# Altium PCB H202.PcbDoc (part 2 of 4)
Units mm, origin at the board's own origin, x right, y up, seen from the top; angles counter-clockwise.
Board outline 35.5 x 51.5 mm, 2 copper layers (Top Layer, Bottom Layer); 187 components, 179 nets, 669 pads, 25 vias.
Unrouted connection lines stored in the file: 414.
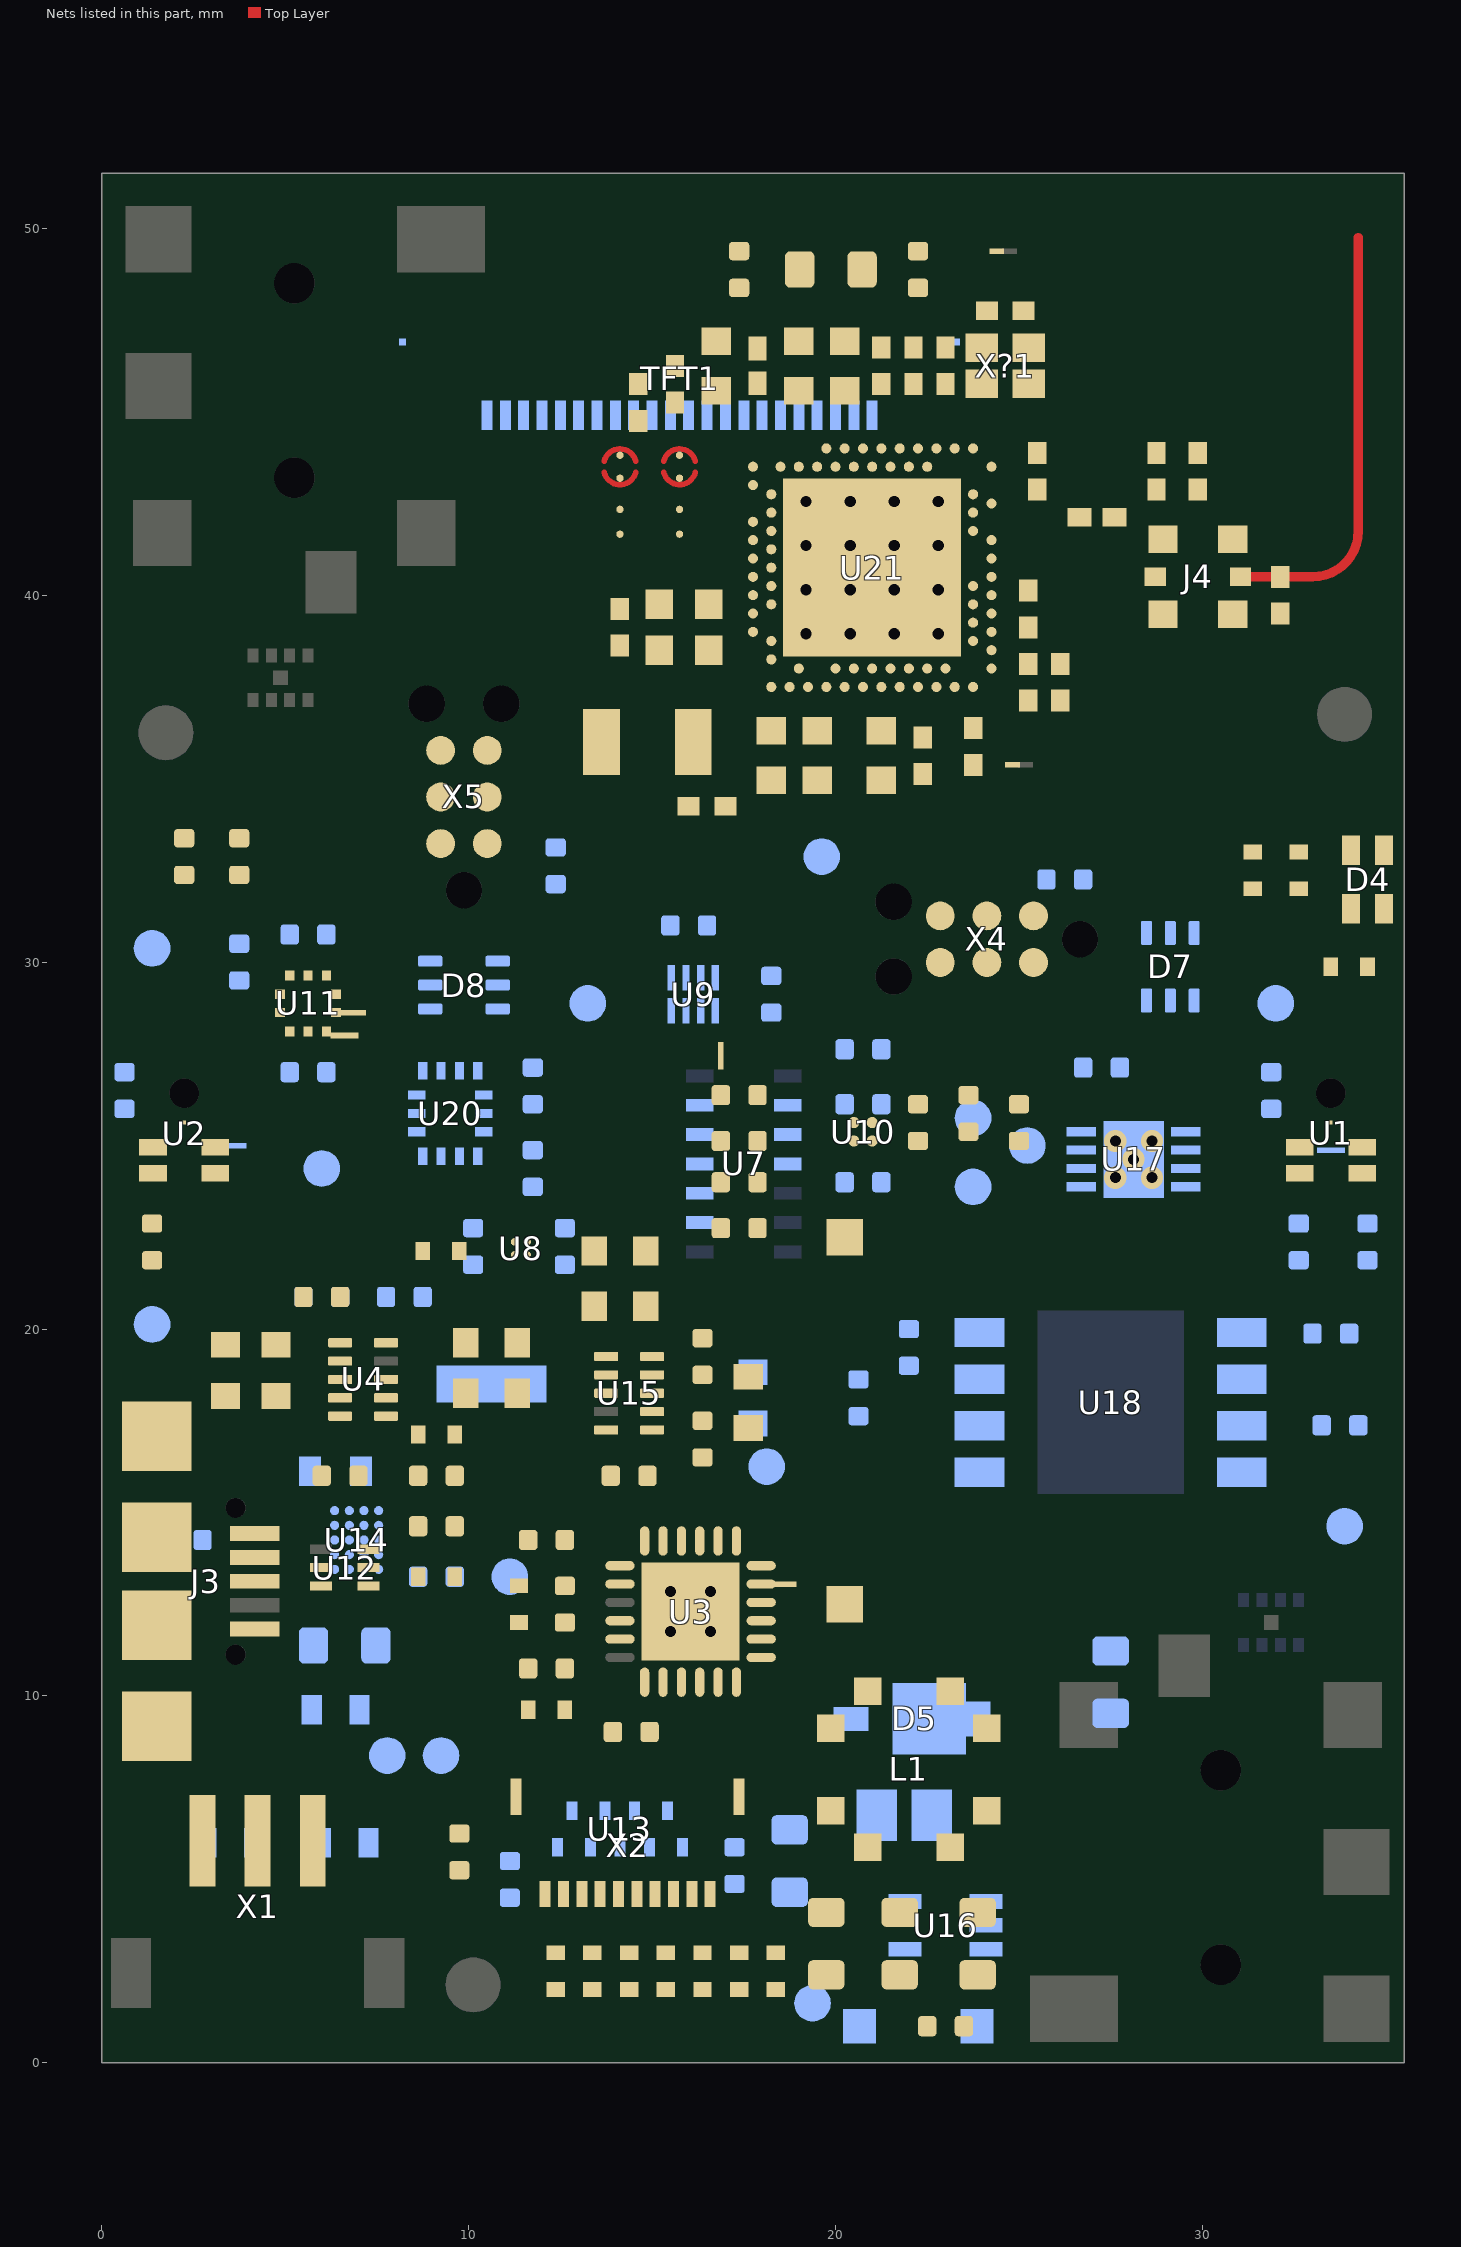
[diagram p2: the nets of this part, all layers, seen from the top]

## Part data (continued)
C8 C9 C11 C12 C33 C34 C36 C37 C38 C41 C42 C43: "10µF ±10% 16V Ceramic Capacitor X5R 0603 (1608 Metric)", Capacitance=10uF, Case Code (Imperial)=0603, Case Code (Metric)=1608, Dielectric=X5R, Manufacturer=Murata, Manufacturer Part Number=GRM188R61C106KAALJ, Max Operating Temperature=85°C, Min Operating Temperature=-55°C, Package Quantity=10000, Supplier Part Number 1=490-12736-1-ND, Tolerance=10%, Voltage Rating=16V, Case/Package=0603, Composition=Ceramic, Height=0.8mm, Length=0.063inch, Mount="Surface Mount", Packaging="Tape and Reel", Pricing 1="1=0.39, 10=0.271, 100=0.1628, 500=0.1221, 1000=0.1031, 2500=0.0977, 5000=0.0923 (USD)", Stock 1=5470, Supplier 1=Digi-Key, Termination=SMD/SMT, Thickness=0.037inch, Voltage Rating (DC)=16V, Weight=0.000222oz, Width=0.031inch
C10 C35: "100pF ±5% 50V Ceramic Capacitor C0G, NP0 0402 (1005 Metric)", Capacitance=100pF, Case Code (Imperial)=0402, Case Code (Metric)=1005, Dielectric=C0G, Dielectric Material=Ceramic, Insulation Resistance=100GR, Manufacturer=Yageo, Manufacturer Part Number=CC0402JRNPO9BN101, Max Operating Temperature=125°C, Min Operating Temperature=-55°C, Package Quantity=1, Supplier Part Number 1=311-1024-6-ND, Temperature Coefficient=30ppm/°C, Tolerance=5%, Voltage=50V, Case/Package=0402, ComponentLink1Description=http://www.farnell.com/datasheets/2213336.pdf?src-supplier=Newark, ComponentLink1URL=http://www.farnell.com/datasheets/2213336.pdf?src-supplier=Newark, ComponentLink2Description=http://www.yageo.com/documents/recent/UPY-GP_NP0_16V-to-50V_16.pdf?src-supplier=Digi-Key, ComponentLink2URL=http://www.yageo.com/documents/recent/UPY-GP_NP0_16V-to-50V_16.pdf?src-supplier=Digi-Key, ComponentLink3Description=http://documents.rs-components.com/techlib://itc_doclist_GB.htm?stockno=6698684&src-supplier=RSComponents, ComponentLink3URL=http://documents.rs-components.com/techlib://itc_doclist_GB.htm?stockno=6698684&src-supplier=RSComponents, ComponentLink4Description=http://www.yageo.com/documents/recent/UPY-GP_NP0_16V-to-50V_8.pdf?src-supplier=Avnet+Europe, ComponentLink4URL=http://www.yageo.com/documents/recent/UPY-GP_NP0_16V-to-50V_8.pdf?src-supplier=Avnet+Europe, ComponentLink5Description=http://www.farnell.com/datasheets/1443161.pdf?src-supplier=Element14, ComponentLink5URL=http://www.farnell.com/datasheets/1443161.pdf?src-supplier=Element14, ComponentLink6Description=http://www.farnell.com/datasheets/2213336.pdf?src-supplier=Element14, ComponentLink6URL=http://www.farnell.com/datasheets/2213336.pdf?src-supplier=Element14, Composition=Ceramic, Depth=0.5mm, Height=0.5mm, Lead Free="Lead Free", Length=1mm, Mount="Surface Mount", Number of Pins=2, Packaging="Tape and Reel", Pricing 1="1=0.1, 10=0.02, 100=0.0089, 500=0.0064, 1000=0.005, 2500=0.0046, 5000=0.0042 (USD)", Radiation Hardening=No, REACH SVHC="No SVHC", Stock 1=3017640, Supplier 1=Digi-Key, Termination=SMD/SMT, Thickness=0.022inch, Voltage Rating=50V, Voltage Rating (DC)=50V, Width=0.5mm
C14 C30: "4.7µF ±20% 6.3V Ceramic Capacitor X5R 0402 (1005 Metric)", Capacitance=4.7uF, Case Code (Imperial)=0402, Case Code (Metric)=1005, Manufacturer=Samsung, Manufacturer Part Number=CL05A475MQ5NRNC, Max Operating Temperature=85°C, Min Operating Temperature=-55°C, Supplier Part Number 1=1276-1056-1-ND, Tolerance=20%, Voltage Rating=6.3V, Case/Package=0402, ComponentLink1Description=https://www.verical.com/server-webapp/html/getDatasheet?partID=359681&src-supplier=Verical, ComponentLink1URL=https://www.verical.com/server-webapp/html/getDatasheet?partID=359681&src-supplier=Verical, ComponentLink2Description=http://www1.futureelectronics.com/doc/SAMSUNG/CL05A475MQ5NRNC.pdf?src-supplier=Future+Electronics, ComponentLink2URL=http://www1.futureelectronics.com/doc/SAMSUNG/CL05A475MQ5NRNC.pdf?src-supplier=Future+Electronics, Length=0.039inch, Mount="Surface Mount", Packaging="Tape and Reel", Pricing 1="1=0.14, 10=0.099, 50=0.0564, 100=0.0467, 500=0.0327, 1000=0.0271, 2500=0.0252, 5000=0.0231 (USD)", RoHS Compliant=Yes, Series=CL, Stock 1=746765, Supplier 1=Digi-Key, Thickness=0.022inch, Width=0.02inch
C16 C29 C31: "10µF ±20% 6.3V Ceramic Capacitor X5R 0402 (1005 Metric)", Capacitance=10uF, Case Code (Imperial)=0402, Case Code (Metric)=1005, Dielectric=X5R, Manufacturer=Samsung, Manufacturer Part Number=CL05A106MQ5NUNC, Max Operating Temperature=85°C, Min Operating Temperature=-55°C, Package Quantity=1, Supplier Part Number 1=1276-1451-1-ND, Tolerance=20%, Voltage Rating=6.3V, Case/Package=0402, ComponentLink1Description=https://www.verical.com/server-webapp/html/getDatasheet?partID=355289&src-supplier=Verical, ComponentLink1URL=https://www.verical.com/server-webapp/html/getDatasheet?partID=355289&src-supplier=Verical, ComponentLink2Description=http://www1.futureelectronics.com/doc/SAMSUNG/CL05A106MQ5NUNC.pdf?src-supplier=Future+Electronics, ComponentLink2URL=http://www1.futureelectronics.com/doc/SAMSUNG/CL05A106MQ5NUNC.pdf?src-supplier=Future+Electronics, Construction=Flat, Depth=0.5mm, Height=0.5mm, Length=1mm, Mount="Surface Mount", Packaging="Tape and Reel", Pricing 1="1=0.27, 10=0.187, 50=0.1248, 100=0.1061, 500=0.0749, 1000=0.0655, 2500=0.0624, 5000=0.0577 (USD)", Radiation Hardening=No, Series=CL, Stock 1=1544395, Supplier 1=Digi-Key, Thickness=0.028inch, Width=0.02inch
C17 C18 C32: "2.2µF ±20% 6.3V Ceramic Capacitor X5R 0402 (1005 Metric)", Capacitance=2.2uF, Case Code (Imperial)=0402, Case Code (Metric)=1005, Dielectric=X5R, Manufacturer=Murata, Manufacturer Part Number=GRM155R60J225ME15D, Max Operating Temperature=85°C, Min Operating Temperature=-55°C, Package Quantity=10000, Supplier Part Number 1=490-4519-1-ND, Tolerance=20%, Voltage=6.3V, Case/Package=0402, ComponentLink1Description=https://www.murata.com/~/media/webrenewal/support/library/catalog/products/capacitor/mlcc/c02e.ashx?la=en-us&src-supplier=Digi-Key, ComponentLink1URL=https://www.murata.com/~/media/webrenewal/support/library/catalog/products/capacitor/mlcc/c02e.ashx?la=en-us&src-supplier=Digi-Key, ComponentLink2Description=http://www.murata.com/~/media/webrenewal/support/library/catalog/products/capacitor/mlcc/c02e.ashx?src-supplier=Avnet, ComponentLink2URL=http://www.murata.com/~/media/webrenewal/support/library/catalog/products/capacitor/mlcc/c02e.ashx?src-supplier=Avnet, ComponentLink3Description=http://www.farnell.com/datasheets/2047859.pdf?src-supplier=Element14, ComponentLink3URL=http://www.farnell.com/datasheets/2047859.pdf?src-supplier=Element14, ComponentLink4Description=https://produktinfo.conrad.com/datenblaetter/450000-474999/450128-da-01-de-VS_KONDENS_GRM155_R60J_225ME15D.pdf?src-supplier=Conrad, ComponentLink4URL=https://produktinfo.conrad.com/datenblaetter/450000-474999/450128-da-01-de-VS_KONDENS_GRM155_R60J_225ME15D.pdf?src-supplier=Conrad, Depth=0.5mm, Height=0.5mm, Lead Free="Lead Free", Length=1mm, Material=Ceramic, Mount="Surface Mount", Packaging="Tape and Reel", Pricing 1="1=0.29, 10=0.199, 100=0.1009, 500=0.0691, 1000=0.0611, 2500=0.0584, 5000=0.0531 (USD)", Radiation Hardening=No, REACH SVHC="No SVHC", Stock 1=4444410, Supplier 1=Digi-Key, Termination=SMD/SMT, Thickness=0.022inch, Voltage Rating=6.3V, Voltage Rating (DC)=6.3V, Width=0.02inch
C19 C20: library part "CAP CER 0.1UF 50V X7R 0402", "0.1µF ±10% 50V Ceramic Capacitor X7R 0402 (1005 Metric)", Capacitance=100nF, Case Code (Imperial)=0402, Case Code (Metric)=1005, Dielectric=X7R, Manufacturer=TDK, Max Operating Temperature=125°C, Min Operating Temperature=-55°C, Package Quantity=1, Ratings=AEC-Q200, Supplier Part Number 1=445-6899-1-ND, Tolerance=10%, Voltage=50V, Case/Package=0402, ComponentLink1Description=http://product.tdk.com/capacitor/mlcc/en/documents/mlccspec_automotive_general_midvoltage_en.pdf?src-supplier=Future+Electronics, ComponentLink1URL=http://product.tdk.com/capacitor/mlcc/en/documents/mlccspec_automotive_general_midvoltage_en.pdf?src-supplier=Future+Electronics, ComponentLink2Description=http://www.farnell.com/datasheets/1807242.pdf?src-supplier=Element14, ComponentLink2URL=http://www.farnell.com/datasheets/1807242.pdf?src-supplier=Element14, ComponentLink3Description=http://www.mouser.com/ds/2/400/lcc_automotive_general_en-843974.pdf?src-supplier=Mouser, ComponentLink3URL=http://www.mouser.com/ds/2/400/lcc_automotive_general_en-843974.pdf?src-supplier=Mouser, ComponentLink4Description=http://www.farnell.com/datasheets/1936565.pdf?src-supplier=Element14, ComponentLink4URL=http://www.farnell.com/datasheets/1936565.pdf?src-supplier=Element14, ComponentLink5Description=http://www.farnell.com/datasheets/1735392.pdf?src-supplier=Element14, ComponentLink5URL=http://www.farnell.com/datasheets/1735392.pdf?src-supplier=Element14, Composition=Ceramic, Depth=0.5mm, Height=0.5mm, Lead Free="Lead Free", Length=1mm, Manufacturer Part Number=CGA2B3X7R1H104K050BB, Mount="Surface Mount", Packaging="Tape and Reel", Pricing 1="1=0.17, 10=0.118, 50=0.0668, 100=0.0553, 500=0.0388, 1000=0.0321, 2500=0.0299, 5000=0.0273 (USD)", REACH SVHC="No SVHC", Stock 1=2925303, Supplier 1=Digi-Key, Termination=SMD/SMT, Thickness=0.022inch, Voltage Rating=50V, Voltage Rating (DC)=50V, Weight=2.3E-05oz, Width=0.02inch
C21 C45: "1µF ±10% 16V Ceramic Capacitor X5R 0402 (1005 Metric)", Capacitance=1uF, Case Code (Imperial)=0402, Case Code (Metric)=1005, Dielectric=X5R, Manufacturer=Yageo, Manufacturer Part Number=CC0402KRX5R7BB105, Max Operating Temperature=85°C, Min Operating Temperature=-55°C, Supplier Part Number 1=311-1691-1-ND, Tolerance=10%, Voltage Rating=16V, Case/Package=0402, ComponentLink1Description=http://www.yageo.com/documents/recent/UPY-GPHC_X5R_4V-to-50V_12.pdf?src-supplier=Avnet+Europe, ComponentLink1URL=http://www.yageo.com/documents/recent/UPY-GPHC_X5R_4V-to-50V_12.pdf?src-supplier=Avnet+Europe, Composition=Ceramic, Depth=0.5mm, Halogen Free="Halogen Free", Height=0.5mm, Lead Free="Lead Free", Length=1mm, Mount="Surface Mount", Packaging="Tape and Reel", Pricing 1="1=0.4, 10=0.278, 100=0.167, 500=0.1253, 1000=0.1058, 2500=0.1002, 5000=0.0947 (USD)", Radiation Hardening=No, Stock 1=1114963, Supplier 1=Digi-Key, Termination=SMD/SMT, Thickness=0.022inch, Voltage Rating (DC)=16V, Weight=2.3E-05oz, Width=0.02inch
C23 C24: "0.1µF ±10% 16V Ceramic Capacitor X7R 0402 (1005 Metric)", Capacitance=100nF, Case Code (Imperial)=0402, Case Code (Metric)=1005, Dielectric=X7R, Manufacturer=YAGEO, Manufacturer Part Number=CC0402KRX7R7BB104, Max Operating Temperature=125°C, Min Operating Temperature=-55°C, Package Quantity=1, Supplier Part Number 1=311-1338-1-ND, Tolerance=10%, Voltage=16V, ComponentLink1Description=http://www.yageo.com/documents/recent/UPY-GPHC_X7R_6.3V-to-50V_8.pdf?src-supplier=Avnet+Europe, ComponentLink1URL=http://www.yageo.com/documents/recent/UPY-GPHC_X7R_6.3V-to-50V_8.pdf?src-supplier=Avnet+Europe, ComponentLink2Description=http://www.yageo.com/documents/recent/UPY-GPHC_X7R_6.3V-to-50V_18.pdf?src-supplier=Digi-Key, ComponentLink2URL=http://www.yageo.com/documents/recent/UPY-GPHC_X7R_6.3V-to-50V_18.pdf?src-supplier=Digi-Key, ComponentLink3Description=http://www.yageo.com/documents/recent/UPY-GPHC_X7R_6.3V-to-50V_8.pdf?src-supplier=Avnet, ComponentLink3URL=http://www.yageo.com/documents/recent/UPY-GPHC_X7R_6.3V-to-50V_8.pdf?src-supplier=Avnet, ComponentLink4Description=http://www.yageo.com/documents/recent/UPY-GPHC_X7R_6.3V-to-50V_18.pdf?src-supplier=Mouser, ComponentLink4URL=http://www.yageo.com/documents/recent/UPY-GPHC_X7R_6.3V-to-50V_18.pdf?src-supplier=Mouser, ComponentLink5Description=http://www.farnell.com/datasheets/2167236.pdf?src-supplier=Element14, ComponentLink5URL=http://www.farnell.com/datasheets/2167236.pdf?src-supplier=Element14, ComponentLink6Description=http://www.farnell.com/datasheets/1489800.pdf?src-supplier=Element14, ComponentLink6URL=http://www.farnell.com/datasheets/1489800.pdf?src-supplier=Element14, Composition=Ceramic, Depth=0.5mm, Halogen Free="Halogen Free", Height=0.5mm, Lead Free="Lead Free", Length=1mm, Mount="Surface Mount", Number of Pins=2, Order=CC0402KRX7R7BB104, Packaging="Tape and Reel", Pricing 1="1=0.1, 10=0.031, 100=0.0136, 500=0.0097, 1000=0.0077, 2500=0.007, 5000=0.0064 (USD)", Radiation Hardening=No, REACH SVHC="No SVHC", Revision="July-2002: Re-released for DXP Platform.", Stock 1=25916830, Supplier 1=Digi-Key, Termination=SMD/SMT, Thickness=0.022inch, Voltage Rating=16V, Voltage Rating (DC)=16V, Width=0.02inch
C25: library part "CAP CER 0.1UF 50V X7R 0402", "0.1µF ±10% 50V Ceramic Capacitor X7R 0402 (1005 Metric)", Capacitance=100nF, Case Code (Imperial)=0402, Case Code (Metric)=1005, Dielectric=X7R, Manufacturer=TDK, Manufacturer Part Number=CGA2B3X7R1H104K050BB, Max Operating Temperature=125°C, Min Operating Temperature=-55°C, Package Quantity=1, Ratings=AEC-Q200, Supplier Part Number 1=445-6899-1-ND, Tolerance=10%, Voltage=50V, Case/Package=0402, ComponentLink1Description=http://product.tdk.com/capacitor/mlcc/en/documents/mlccspec_automotive_general_midvoltage_en.pdf?src-supplier=Future+Electronics, ComponentLink1URL=http://product.tdk.com/capacitor/mlcc/en/documents/mlccspec_automotive_general_midvoltage_en.pdf?src-supplier=Future+Electronics, ComponentLink2Description=http://www.farnell.com/datasheets/1807242.pdf?src-supplier=Element14, ComponentLink2URL=http://www.farnell.com/datasheets/1807242.pdf?src-supplier=Element14, ComponentLink3Description=http://www.mouser.com/ds/2/400/lcc_automotive_general_en-843974.pdf?src-supplier=Mouser, ComponentLink3URL=http://www.mouser.com/ds/2/400/lcc_automotive_general_en-843974.pdf?src-supplier=Mouser, ComponentLink4Description=http://www.farnell.com/datasheets/1936565.pdf?src-supplier=Element14, ComponentLink4URL=http://www.farnell.com/datasheets/1936565.pdf?src-supplier=Element14, ComponentLink5Description=http://www.farnell.com/datasheets/1735392.pdf?src-supplier=Element14, ComponentLink5URL=http://www.farnell.com/datasheets/1735392.pdf?src-supplier=Element14, Composition=Ceramic, Depth=0.5mm, Height=0.5mm, Lead Free="Lead Free", Length=1mm, Mount="Surface Mount", Packaging="Tape and Reel", Pricing 1="1=0.17, 10=0.118, 50=0.0668, 100=0.0553, 500=0.0388, 1000=0.0321, 2500=0.0299, 5000=0.0273 (USD)", REACH SVHC="No SVHC", Stock 1=2925303, Supplier 1=Digi-Key, Termination=SMD/SMT, Thickness=0.022inch, Voltage Rating=50V, Voltage Rating (DC)=50V, Weight=2.3E-05oz, Width=0.02inch
C26: library part "CAP CER 4.7UF 10V X5R 0603", "4.7µF ±10% 10V Ceramic Capacitor X5R 0603 (1608 Metric)", Capacitance=4.7uF, Case Code (Imperial)=0603, Case Code (Metric)=1608, Dielectric=X5R, Manufacturer=Yageo, Manufacturer Part Number=CC0603KRX5R6BB475, Max Operating Temperature=85°C, Min Operating Temperature=-55°C, Package Quantity=1, Supplier Part Number 1=311-1455-1-ND, Tolerance=10%, Voltage Rating=10V, Case/Package=0603, ComponentLink1Description=http://www.farnell.com/datasheets/2167237.pdf?src-supplier=Element14, ComponentLink1URL=http://www.farnell.com/datasheets/2167237.pdf?src-supplier=Element14, ComponentLink2Description=http://www.yageo.com/documents/recent/UPY-GPHC_X5R_4V-to-50V_25.pdf?src-supplier=Digi-Key, ComponentLink2URL=http://www.yageo.com/documents/recent/UPY-GPHC_X5R_4V-to-50V_25.pdf?src-supplier=Digi-Key, ComponentLink3Description=http://www.yageo.com/documents/recent/UPY-GPHC_X5R_4V-to-50V_12.pdf?src-supplier=Avnet, ComponentLink3URL=http://www.yageo.com/documents/recent/UPY-GPHC_X5R_4V-to-50V_12.pdf?src-supplier=Avnet, ComponentLink4Description=http://www.yageo.com/documents/recent/UPY-GPHC_X5R_4V-to-50V_12.pdf?src-supplier=Avnet+Europe, ComponentLink4URL=http://www.yageo.com/documents/recent/UPY-GPHC_X5R_4V-to-50V_12.pdf?src-supplier=Avnet+Europe, Composition=Ceramic, Depth=0.8mm, Halogen Free="Halogen Free", Height=0.8mm, Lead Free="Lead Free", Length=1.6mm, Mount="Surface Mount", Packaging="Tape and Reel", Pricing 1="1=0.26, 10=0.18, 100=0.102, 500=0.072, 1000=0.063 (USD)", Radiation Hardening=No, REACH SVHC=Unknown, Stock 1=325858, Supplier 1=Digi-Key, Termination=SMD/SMT, Thickness=0.035inch, Voltage Rating (DC)=10V, Width=0.8mm
C28: "1µF ±20% 25V Ceramic Capacitor X5R 0603 (1608 Metric)", Capacitance=1uF, Case Code (Imperial)=0603, Case Code (Metric)=1608, Dielectric=X5R, Manufacturer=Yageo, Manufacturer Part Number=CC0603MRX5R8BB105, Max Operating Temperature=85°C, Min Operating Temperature=-55°C, Supplier Part Number 1=311-1823-1-ND, Tolerance=20%, Voltage Rating=25V, Case/Package=0603, ComponentLink1Description=http://www.yageo.com/exep/pages/download/literatures/ProductSelectionGuide%202014_Final_2.pdf?src-supplier=Digi-Key, ComponentLink1URL=http://www.yageo.com/exep/pages/download/literatures/ProductSelectionGuide%202014_Final_2.pdf?src-supplier=Digi-Key, ComponentLink2Description=http://www.yageo.com/documents/recent/UPY-GPHC_X5R_4V-to-50V_25.pdf?src-supplier=Digi-Key, ComponentLink2URL=http://www.yageo.com/documents/recent/UPY-GPHC_X5R_4V-to-50V_25.pdf?src-supplier=Digi-Key, Halogen Free="Halogen Free", Lead Free="Lead Free", Length=0.063inch, Mount="Surface Mount", Packaging="Tape and Reel", Pricing 1="1=0.13, 10=0.093, 50=0.0528, 100=0.0438, 500=0.0307, 1000=0.0254 (USD)", Stock 1=31570, Supplier 1=Digi-Key, Thickness=0.035inch, Voltage Rating (DC)=25V, Width=0.031inch
C40: "10µF ±10% 16V Ceramic Capacitor X7R 0805 (2012 Metric)", Capacitance=10uF, Case Code (Imperial)=0805, Case Code (Metric)=2012, Dielectric=X7R, Manufacturer=Samsung, Manufacturer Part Number=CL21B106KOQNNNG, Max Operating Temperature=125°C, Min Operating Temperature=-55°C, Package Quantity=3000, Supplier Part Number 1=1276-6472-1-ND, Tolerance=10%, Voltage Rating=16V, Case/Package=0805, ComponentLink1Description=http://www.samsungsem.com/kr/support/product-search/mlcc/CL21B106KOQNNNG.jsp?src-supplier=Digi-Key, ComponentLink1URL=http://www.samsungsem.com/kr/support/product-search/mlcc/CL21B106KOQNNNG.jsp?src-supplier=Digi-Key, ComponentLink2Description=https://produktinfo.conrad.com/datenblaetter/450000-474999/454918-da-01-en-VS_KONDENSATOR_0805.pdf?src-supplier=Conrad, ComponentLink2URL=https://produktinfo.conrad.com/datenblaetter/450000-474999/454918-da-01-en-VS_KONDENSATOR_0805.pdf?src-supplier=Conrad, Depth=1.25mm, Lead Free="Lead Free", Length=0.079inch, Material=Ceramic, Mount="Surface Mount", Packaging="Tape and Reel", Pricing 1="1=0.3, 10=0.207, 100=0.1173, 500=0.0828, 1000=0.0725 (USD)", Stock 1=251380, Supplier 1=Digi-Key, Thickness=0.055inch, Width=0.049inch
C44 C48 C49: "0.1µF ±10% 16V Ceramic Capacitor X7R 0402 (1005 Metric)", Capacitance=100nF, Case Code (Imperial)=0402, Case Code (Metric)=1005, Dielectric=X7R, Manufacturer=Yageo, Manufacturer Part Number=CC0402KRX7R7BB104, Max Operating Temperature=125°C, Min Operating Temperature=-55°C, Package Quantity=1, Supplier Part Number 1=311-1338-1-ND, Tolerance=10%, Voltage=16V, ComponentLink1Description=http://www.yageo.com/documents/recent/UPY-GPHC_X7R_6.3V-to-50V_8.pdf?src-supplier=Avnet+Europe, ComponentLink1URL=http://www.yageo.com/documents/recent/UPY-GPHC_X7R_6.3V-to-50V_8.pdf?src-supplier=Avnet+Europe, ComponentLink2Description=http://www.yageo.com/documents/recent/UPY-GPHC_X7R_6.3V-to-50V_18.pdf?src-supplier=Digi-Key, ComponentLink2URL=http://www.yageo.com/documents/recent/UPY-GPHC_X7R_6.3V-to-50V_18.pdf?src-supplier=Digi-Key, ComponentLink3Description=http://www.yageo.com/documents/recent/UPY-GPHC_X7R_6.3V-to-50V_8.pdf?src-supplier=Avnet, ComponentLink3URL=http://www.yageo.com/documents/recent/UPY-GPHC_X7R_6.3V-to-50V_8.pdf?src-supplier=Avnet, ComponentLink4Description=http://www.yageo.com/documents/recent/UPY-GPHC_X7R_6.3V-to-50V_18.pdf?src-supplier=Mouser, ComponentLink4URL=http://www.yageo.com/documents/recent/UPY-GPHC_X7R_6.3V-to-50V_18.pdf?src-supplier=Mouser, ComponentLink5Description=http://www.farnell.com/datasheets/2167236.pdf?src-supplier=Element14, ComponentLink5URL=http://www.farnell.com/datasheets/2167236.pdf?src-supplier=Element14, ComponentLink6Description=http://www.farnell.com/datasheets/1489800.pdf?src-supplier=Element14, ComponentLink6URL=http://www.farnell.com/datasheets/1489800.pdf?src-supplier=Element14, Composition=Ceramic, Depth=0.5mm, Halogen Free="Halogen Free", Height=0.5mm, Lead Free="Lead Free", Length=1mm, Mount="Surface Mount", Number of Pins=2, Order=CC0402KRX7R7BB104, Packaging="Tape and Reel", Pricing 1="1=0.1, 10=0.031, 100=0.0136, 500=0.0097, 1000=0.0077, 2500=0.007, 5000=0.0064 (USD)", Radiation Hardening=No, REACH SVHC="No SVHC", Revision="July-2002: Re-released for DXP Platform.", Stock 1=25916830, Supplier 1=Digi-Key, Termination=SMD/SMT, Thickness=0.022inch, Voltage Rating=16V, Voltage Rating (DC)=16V, Width=0.02inch
C50 C55: library part C0603-4µ7-6.3V-X7R, "Capacitor, X7R, ±10%, 6.3V", Manufacturer=Samsung, Manufacturer Part Number=CL10B475KQ8NQNC, Part number IPS=00000002541, Supplier Part Number 1=1276-2087-1-ND, Artikkelnr Noca=20039473, ComponentLink1Description=Datasheet, ComponentLink2Description="Supplier link", Footprint Doc=0603, HelpURL=http://media.digikey.com/pdf/Data%20Sheets/Samsung%20PDFs/CL10B475KQ8NQNC_Spec.pdf, LatestRevisionDate=2015-06-10, Note=6.3V, Part Number=C0603-4µ7-6.3V-X7R, Pin Count=2, Published=2015-06-10, Publisher="Nordic Semiconductor", Supplier 1=Digi-Key
C51 C52 C66 C67: library part C0402-12p, "Capacitor, NP0, ±2%", Part number IPS=00000002398, Artikkelnr Noca=20029159, ComponentLink1Description=Datasheet, ComponentLink2Description="Supplier link", Footprint Doc=0402, LatestRevisionDate=2011-05-11, Note=50V, Part Number=C0402-12p, Pin Count=2, Published=2009-05-08, Publisher="Nordic Semiconductor"
C53 C57: library part C0603-4µ7-10V-X7S, "Capacitor, X7S, ±10%, 10V", Part number IPS=00000001779, Supplier Part Number 1=445-14258-1-ND, Artikkelnr Noca=20030013, ComponentLink1Description=Datasheet, ComponentLink2Description="Supplier link", Footprint Doc=0603, LatestRevisionDate=2016-08-15, Note=10V, Part Number=C0603-4µ7-10V-X7S, Pin Count=2, Published=2016-08-15, Publisher="Nordic Semiconductor", Supplier 1=Digi-Key
C54 C60 C62 C65: library part C0402-100n, "Capacitor, X7R, ±10%", Part number IPS=00000005296, Artikkelnr Noca=20039200, ComponentLink1Description=Datasheet, ComponentLink2Description="Supplier link", Footprint Doc=0402, LatestRevisionDate=2009-11-23, Note=16V, Part Number=C0402-100n, Pin Count=2, Published=2009-05-08, Publisher="Nordic Semiconductor"
C56 C58: library part C0603-1µ0, "Capacitor, X7R, ±10%", Part number IPS=00000000616, Artikkelnr Noca=20039282, ComponentLink1Description=Datasheet, ComponentLink2Description="Supplier link", Footprint Doc=0603, LatestRevisionDate=2013-06-05, Note=16V, Part Number=C0603-1µ0, Pin Count=2, Published=2009-05-08, Publisher="Nordic Semiconductor"
C59: library part C0402-47n, "Capacitor, X7R, ±10%", Part number IPS=N.A., Artikkelnr Noca=20039389, ComponentLink1Description=Datasheet, ComponentLink2Description="Supplier link", Footprint Doc=0402, LatestRevisionDate=2009-05-08, Note="Chip Cap 10%", Part Number=C0402-47n, Pin Count=2, Published=2009-05-08, Publisher="Nordic Semiconductor"
C61 C69 C71: library part C0402-N.C., "Not mounted", Part number IPS=N.A., Artikkelnr Noca=N.A., Assembly="Not mounted", ComponentLink1Description=Datasheet, ComponentLink2Description="Supplier link", Footprint Doc=0402, LatestRevisionDate=2009-05-08, Note="Chip Cap", Part Number=C0402-N.C., Pin Count=2, Published=2009-05-08, Publisher="Nordic Semiconductor"
C63: library part C0402-0.8p, "Capacitor, NP0, ±5%", Part number IPS=00000007782, Artikkelnr Noca=20029147, ComponentLink1Description=Datasheet, ComponentLink2Description="Supplier link", Footprint Doc=0402, LatestRevisionDate=2012-11-21, Note=50V, Part Number=C0402-0.8p, Pin Count=2, Published=2009-05-08, Publisher="Nordic Semiconductor"
C64: library part C0402-820p, "Capacitor, NP0, ±5%", Part number IPS=N.A., Artikkelnr Noca=20029219, ComponentLink1Description=Datasheet, ComponentLink2Description="Supplier link", Footprint Doc=0402, LatestRevisionDate=2009-05-08, Note=50V, Part Number=C0402-820p, Pin Count=2, Published=2009-05-08, Publisher="Nordic Semiconductor"
C68: library part C0402-100p, "Capacitor, NP0, ±5%", Part number IPS=00000002361, Artikkelnr Noca=20029135, ComponentLink1Description=Datasheet, ComponentLink2Description="Supplier link", Footprint Doc=0402, LatestRevisionDate=2009-05-08, Note=50V, Part Number=C0402-100p, Pin Count=2, Published=2009-05-08, Publisher="Nordic Semiconductor"
C70: library part C0402-0.5p, "Capacitor, NP0, ±0.05pF", Part number IPS=N.A., Supplier Part Number 1=490-11250-1-ND, Artikkelnr Noca=20020007, ComponentLink1Description=Datasheet, ComponentLink2Description="Supplier link", Footprint Doc=0402, LatestRevisionDate=2017-02-23, Note=50V, Part Number=C0402-0.5p, Pin Count=2, Published=2009-05-08, Publisher="Nordic Semiconductor", Supplier 1=Digi-Key
C72: library part C0402-1.2p, "Capacitor, NP0, ±0.1pF", Part number IPS=00000005410, Artikkelnr Noca=20029157, ComponentLink1Description=Datasheet, ComponentLink2Description="Supplier link", Footprint Doc=0402, LatestRevisionDate=2011-05-11, Note=50V, Part Number=C0402-1.2p, Pin Count=2, Published=2009-05-08, Publisher="Nordic Semiconductor"
D1 D2 D3: library part "TVS DIODE ESDA7P120-1U1M 5.5V 11.5V 1610", "11.5V Clamp 120A (8/20µs) Ipp Tvs Diode Surface Mount 1610", Case Code (Imperial)=0603, Case Code (Metric)=1610, Clamping Voltage=11.5V, Manufacturer=STMicroelectronics, Max Operating Temperature=150°C, Min Breakdown Voltage=6.4V, Min Operating Temperature=-55°C, Peak Pulse Current=120A, Peak Pulse Power=1.4kW, Power Line Protection=No, Reverse Standoff Voltage=5.5V, Supplier Part Number 1=497-17159-1-ND, Case/Package=0603, ComponentLink1Description=http://www.st.com/content/ccc/resource/technical/document/datasheet/group3/5e/7c/5d/76/3f/de/45/35/DM00359316/files/DM00359316.pdf/jcr:content/translations/en.DM00359316.pdf?src-supplier=Digi-Key, ComponentLink1URL=http://www.st.com/content/ccc/resource/technical/document/datasheet/group3/5e/7c/5d/76/3f/de/45/35/DM00359316/files/DM00359316.pdf/jcr:content/translations/en.DM00359316.pdf?src-supplier=Digi-Key, ComponentLink2Description=http://www.farnell.com/datasheets/2815837.pdf?src-supplier=Newark, ComponentLink2URL=http://www.farnell.com/datasheets/2815837.pdf?src-supplier=Newark, ComponentLink3Description=http://www.farnell.com/datasheets/2815837.pdf?src-supplier=Farnell, ComponentLink3URL=http://www.farnell.com/datasheets/2815837.pdf?src-supplier=Farnell, ComponentLink4Description=http://www.farnell.com/datasheets/2815837.pdf?src-supplier=Element14, ComponentLink4URL=http://www.farnell.com/datasheets/2815837.pdf?src-supplier=Element14, Composition=Zener, Manufacturer Part Number=ESDA7P120-1U1M, Mount="Surface Mount", Number of Unidirectional Channels=1, Packaging="Cut Tape", Pricing 1="1=0.35, 10=0.287, 25=0.2624, 100=0.1647, 250=0.1629, 500=0.1525, 1000=0.1037, 2500=0.0994 (USD)", Stock 1=15775, Supplier 1=Digi-Key
D4: library part "LED RGB DIFFUSED SMD", "Red, Green, Blue (RGB) 624nm Red, 525nm Green, 470nm Blue LED Indication - Discrete 2V Red, 3.3V Green, 3.3V Blue 0606 (1616 Metric)", Case Code (Imperial)=0606, Case Code (Metric)=1616, Color=Blue,Green,Red, Forward Voltage=3.3V, Manufacturer="Wurth Electronics", Supplier Part Number 1=732-11390-1-ND, Test Current=20mA, Case/Package=0606, ComponentLink1Description=https://katalog.we-online.de/led/datasheet/150066M153000.pdf?src-supplier=Digi-Key, ComponentLink1URL=https://katalog.we-online.de/led/datasheet/150066M153000.pdf?src-supplier=Digi-Key, ComponentLink2Description=http://www.farnell.com/datasheets/2301702.pdf?src-supplier=Farnell, ComponentLink2URL=http://www.farnell.com/datasheets/2301702.pdf?src-supplier=Farnell, ComponentLink3Description=http://www.farnell.com/datasheets/2301702.pdf?src-supplier=Newark, ComponentLink3URL=http://www.farnell.com/datasheets/2301702.pdf?src-supplier=Newark, ComponentLink4Description=http://www.farnell.com/datasheets/2301702.pdf?src-supplier=Element14, ComponentLink4URL=http://www.farnell.com/datasheets/2301702.pdf?src-supplier=Element14, Dominant Wavelength=470nm, Element Configuration="Common Anode", Height=0.5mm, Length=1.6mm, Lens Size=1.6mm, Lens Style=Flat, Lens Transparency=Diffused, Luminous Intensity=180mcd, Manufacturer Part Number=150066M153000, Mount="Surface Mount", Packaging="Tape and Reel", Pricing 1="1=0.51, 50=0.415, 100=0.298, 500=0.272 (USD)", Stock 1=7810, Supplier 1=Digi-Key, Viewing Angle=120°, Width=1.6mm
D5: library part "DIODE SCHOTTKY 20V 1A STMITEFLAT", "Diode Schottky 20V 1A Surface Mount STmite Flat", Average Rectified Current=1A, Forward Voltage=440mV, Manufacturer=STMicroelectronics, Max Operating Temperature=150°C, Max Repetitive Reverse Voltage (Vrrm)=20V, Max Reverse Leakage Current=300uA, Max Surge Current=50A, Min Operating Temperature=-65°C, Package Quantity=1, Peak Reverse Current=3.9uA, Supplier Part Number 1=497-12281-1-ND, ComponentLink1Description=http://www.st.com/web/en/resource/technical/document/datasheet/CD00198749.pdf?src-supplier=Future+Electronics, ComponentLink1URL=http://www.st.com/web/en/resource/technical/document/datasheet/CD00198749.pdf?src-supplier=Future+Electronics, ComponentLink2Description=http://www.st.com/content/ccc/resource/technical/document/datasheet/b2/7e/6d/c8/81/31/4e/f2/CD00198749.pdf/files/CD00198749.pdf/jcr:content/translations/en.CD00198749.pdf?src-supplier=Digi-Key, ComponentLink2URL=http://www.st.com/content/ccc/resource/technical/document/datasheet/b2/7e/6d/c8/81/31/4e/f2/CD00198749.pdf/files/CD00198749.pdf/jcr:content/translations/en.CD00198749.pdf?src-supplier=Digi-Key, ComponentLink3Description=http://www.st.com/st-web-ui/static/active/en/resource/technical/document/datasheet/CD00198749.pdf?src-supplier=Mouser, ComponentLink3URL=http://www.st.com/st-web-ui/static/active/en/resource/technical/document/datasheet/CD00198749.pdf?src-supplier=Mouser, Element Configuration=Single, Forward Current=1A, Lead Free="Lead Free", Manufacturer Part Number=STPS120MF, Max Reverse Voltage (DC)=20V, Mount="Surface Mount", Number of Pins=2, Packaging="Tape and Reel", Peak Non-Repetitive Surge Current=50A, Pricing 1="1=0.48, 10=0.409, 100=0.3057, 500=0.2402, 1000=0.1856, 2500=0.1692, 5000=0.1583 (USD)", Radiation Hardening=No, Stock 1=3984, Supplier 1=Digi-Key
D6: library part "DIODE ZENER 3.3V 500MW SOD123", "Zener Diode ±5% Surface Mount SOD-123", Case/Package=SOD-123-2, Forward Voltage=900mV, Manufacturer=Diodes, Max Operating Temperature=150°C, Max Power Dissipation=500mW, Max Reverse Current=25uA, Min Operating Temperature=-65°C, Package Quantity=3000, Supplier Part Number 1=MMSZ5226B-FDICT-ND, Test Current=20mA, Tolerance=5%, Voltage Rating (DC)=3.3V, ComponentLink1Description=http://www.diodes.com/datasheets/ds18010.pdf?src-supplier=Avnet+Europe, ComponentLink1URL=http://www.diodes.com/datasheets/ds18010.pdf?src-supplier=Avnet+Europe, Element Configuration=Single, Height=1.35mm, Impedance=28R, Lead Free="Lead Free", Length=3.85mm, Manufacturer Part Number=MMSZ5226B-7-F, Max Reverse Leakage Current=25uA, Mount="Surface Mount", Number of Pins=2, Packaging="Tape and Reel", Power Dissipation=500mW, Power Rating=500mW, Pricing 1="1=0.19, 10=0.164, 100=0.063, 500=0.046, 1000=0.0309 (USD)", Radiation Hardening=No, Stock 1=63613, Supplier 1=Digi-Key, Termination=SMD/SMT, Voltage Tolerance=5%, Weight=0.000353oz, Width=1.7mm, Working Voltage=3.3V, Zener Current=25uA, Zener Voltage=3.3V
D7 D8: library part "TVS DIODE 5V 12.5V 5CH SC88", "12.5V Clamp 8A (8/20µs) Ipp Tvs Diode Surface Mount SC-88/SC70-6/SOT-363", Breakdown Voltage=6.2V, Capacitance=130pF, Case/Package=SC, Clamping Voltage=12.5V, Leakage Current=5uA, Manufacturer="ON Semiconductor", Max Breakdown Voltage=7.2V, Max Operating Temperature=125°C, Max Output Current=8A, Max Power Dissipation=100W, Min Operating Temperature=-40°C, Package Quantity=1, Power Line Protection=No, Reverse Standoff Voltage=5V, Supplier Part Number 1=SMF05CT1GOSCT-ND, Test Current=1mA, ComponentLink1Description=http://www.farnell.com/datasheets/1708354.pdf?src-supplier=Element14, ComponentLink1URL=http://www.farnell.com/datasheets/1708354.pdf?src-supplier=Element14, ComponentLink2Description=http://www.onsemi.com/pub/Collateral/SMF05C-D.PDF?src-supplier=Digi-Key, ComponentLink2URL=http://www.onsemi.com/pub/Collateral/SMF05C-D.PDF?src-supplier=Digi-Key, ComponentLink3Description=http://www.mouser.com/ds/2/308/SMF05C-D-100912.pdf?src-supplier=Mouser, ComponentLink3URL=http://www.mouser.com/ds/2/308/SMF05C-D-100912.pdf?src-supplier=Mouser, ComponentLink4Description=http://www.onsemi.com/pub/Collateral/SMF05C-D.PDF?src-supplier=Avnet, ComponentLink4URL=http://www.onsemi.com/pub/Collateral/SMF05C-D.PDF?src-supplier=Avnet, ComponentLink5Description=https://www.verical.com/server-webapp/html/getDatasheet?partID=98371&src-supplier=Verical, ComponentLink5URL=https://www.verical.com/server-webapp/html/getDatasheet?partID=98371&src-supplier=Verical, Composition=Zener, Contact Plating=Tin,Matte, Depth=1.25mm, Direction=Unidirectional, Element Configuration="Common Anode", ESD Protection=Yes, Height=1mm, Lead Free="Lead Free", Length=2mm, Manufacturer Part Number=SMF05CT1G, Max Reverse Leakage Current=5uA, Max Surge Current=8A, Min Breakdown Voltage=6.2V, Mount="Surface Mount", Number of Channels=5, Number of Elements=5, Number of Pins=6, Number of Unidirectional Channels=5, Packaging="Tape and Reel", Peak Pulse Current=8A, Peak Pulse Power=100W, Polarity=Unidirectional, Power Dissipation=100W, Pricing 1="1=0.41, 10=0.307, 25=0.2768, 100=0.1459, 250=0.1444, 500=0.1293, 1000=0.1006 (USD)", Radiation Hardening=No, REACH SVHC="No SVHC", Reverse Breakdown Voltage=6.2V, Stock 1=33811, Supplier 1=Digi-Key, Termination=SMD/SMT, Voltage Rating (DC)=5V, Width=1.25mm, Working Voltage=5V
FB1: "1 kOhms @ 100MHz 1  Ferrite Bead 0402 (1005 Metric) 350mA 490mOhm", Case Code (Imperial)=0402, Case Code (Metric)=1005, Current Rating=350mA, DC Resistance (DCR)=490mR, Manufacturer=Murata, Manufacturer Part Number=BLM15AX102SN1D, Max Operating Temperature=125°C, Min Operating Temperature=-55°C, Package Quantity=1, Supplier Part Number 1=490-5442-1-ND, Test Frequency=100MHz, Tolerance=25%, Case/Package=0402, ComponentLink1Description=https://www.murata.com/en-us/products/productdata/8796740059166/ENFA0018.pdf?src-supplier=Digi-Key, ComponentLink1URL=https://www.murata.com/en-us/products/productdata/8796740059166/ENFA0018.pdf?src-supplier=Digi-Key, ComponentLink2Description=http://search.murata.co.jp/Ceramy/image/img/PDF/ENG/L0110S0100BLM15AX_SN.pdf?src-supplier=Future+Electronics, ComponentLink2URL=http://search.murata.co.jp/Ceramy/image/img/PDF/ENG/L0110S0100BLM15AX_SN.pdf?src-supplier=Future+Electronics, ComponentLink3Description=http://www.produktinfo.conrad.com/datenblaetter/1100000-1199999/001171674-da-01-en-CHIP_DROSSEL0402_1000R_350MA_1_0X0_5MM.pdf?src-supplier=Conrad, ComponentLink3URL=http://www.produktinfo.conrad.com/datenblaetter/1100000-1199999/001171674-da-01-en-CHIP_DROSSEL0402_1000R_350MA_1_0X0_5MM.pdf?src-supplier=Conrad, ComponentLink4Description=http://www.produktinfo.conrad.com/datenblaetter/1100000-1199999/001172166-da-01-en-DROSSEL_0402_1000R_31_0X0_5MM_10000ST.pdf?src-supplier=Conrad, ComponentLink4URL=http://www.produktinfo.conrad.com/datenblaetter/1100000-1199999/001172166-da-01-en-DROSSEL_0402_1000R_31_0X0_5MM_10000ST.pdf?src-supplier=Conrad, Depth=0.5mm, Height=0.5mm, Impedance=1kR, Lead Free="Lead Free", Length=1mm, Material=Ferrite,Steel, Max Current Rating=350mA, Max DC Current=350mA, Number of Circuits=1, Number of Lines=1, Number of Pins=2, Packaging="Tape and Reel", Pricing 1="1=0.11, 10=0.09, 25=0.0812, 50=0.0596, 100=0.0514, 250=0.0406, 500=0.0343, 1000=0.0289, 5000=0.0257 (USD)", REACH SVHC="No SVHC", Stock 1=138597, Supplier 1=Digi-Key, Termination=SMD/SMT, Width=0.5mm
FB2: "470 Ohms @ 100MHz 1  Ferrite Bead 0603 (1608 Metric) 500mA 210mOhm", Case Code (Imperial)=0603, Case Code (Metric)=1608, Current Rating=500mA, DC Resistance (DCR)=210mR, Frequency=100MHz, Manufacturer=Murata, Manufacturer Part Number=BLM18EG471SN1D, Max Operating Temperature=125°C, Min Operating Temperature=-55°C, Package Quantity=1, Supplier Part Number 1=490-3993-6-ND, Tolerance=25%, Case/Package=0603, ComponentLink1Description=http://uk.rs-online.com/webdocs/11b5/0900766b811b5866.pdf?src-supplier=RSComponents, ComponentLink1URL=http://uk.rs-online.com/webdocs/11b5/0900766b811b5866.pdf?src-supplier=RSComponents, ComponentLink2Description=http://www.farnell.com/datasheets/5169.pdf?src-supplier=Element14, ComponentLink2URL=http://www.farnell.com/datasheets/5169.pdf?src-supplier=Element14, ComponentLink3Description=https://www.murata.com/en-global/products/productdata/8796733767710/S0580E.pdf?src-supplier=Digi-Key, ComponentLink3URL=https://www.murata.com/en-global/products/productdata/8796733767710/S0580E.pdf?src-supplier=Digi-Key, ComponentLink4Description=https://www.distrelec.biz/Web/Downloads/_t/ds/blm-series_eng_tds.pdf?mime=application%2Fpdf&src-supplier=Distrelec, ComponentLink4URL=https://www.distrelec.biz/Web/Downloads/_t/ds/blm-series_eng_tds.pdf?mime=application%2Fpdf&src-supplier=Distrelec, ComponentLink5Description=https://www.verical.com/server-webapp/html/getDatasheet?partID=228865&src-supplier=Verical, ComponentLink5URL=https://www.verical.com/server-webapp/html/getDatasheet?partID=228865&src-supplier=Verical, ComponentLink6Description=http://search.murata.co.jp/Ceramy/image/img/PDF/ENG/L0110S0101BLM18E.pdf?src-supplier=Avnet, ComponentLink6URL=http://search.murata.co.jp/Ceramy/image/img/PDF/ENG/L0110S0101BLM18E.pdf?src-supplier=Avnet, ComponentLink7Description=http://www.produktinfo.conrad.com/datenblaetter/1100000-1199999/001171700-da-01-en-CHIP_DROSSEL0603_470R_500MA_1_6X0_8MM.pdf?src-supplier=Conrad, ComponentLink7URL=http://www.produktinfo.conrad.com/datenblaetter/1100000-1199999/001171700-da-01-en-CHIP_DROSSEL0603_470R_500MA_1_6X0_8MM.pdf?src-supplier=Conrad, ComponentLink8Description=http://www.produktinfo.conrad.com/datenblaetter/1100000-1199999/001172269-da-01-en-DROSSEL_0603_470R_1_6X0_8MM_4000ST.pdf?src-supplier=Conrad, ComponentLink8URL=http://www.produktinfo.conrad.com/datenblaetter/1100000-1199999/001172269-da-01-en-DROSSEL_0603_470R_1_6X0_8MM_4000ST.pdf?src-supplier=Conrad, Core Material=Ferrite, DC Current=500mA, Depth=0.8mm, Height=0.8mm, Impedance="470 Ohm", Lead Free="Lead Free", Length=1.6mm, Material=Ferrite,Steel, Max Current Rating=500mA, Max DC Current=500mA, Military Standard=Not, Mount="Surface Mount", Number of Circuits=1, Number of Lines=1, Number of Pins=2, Packaging="Tape and Reel", Pricing 1="1=0.23, 10=0.175, 25=0.1452, 50=0.1252, 100=0.1126, 250=0.0951, 500=0.0851, 1000=0.0726 (USD)", Radiation Hardening=No, REACH SVHC="No SVHC", Resistance=210mR, Stock 1=4285, Supplier 1=Digi-Key, Termination=SMD/SMT, Test Frequency=100MHz, Weight=7.1E-05oz, Width=0.8mm
FID1 FID2 FID3: library part Fiducial, "Fiducial mark.  There is nothing to buy or mount.", ClassName=FiducialMark, CompType=Fiducial, Manufacturer=N/A, Manufacturer Part Number=N/A, MountType=N/A, PackageReference=Fiducial
J1 J2: "5 conductor, 2.5 mm, SMT Audio Jack w/ Tip Switch", Package=None, Supplier Part Number 1=CP-SJ2-25515B-SMT-CT-ND, Availability=Unavailable, Contact="5(Excludes TIP Switch)", Datasheet=https://www.cuidevices.com/product/resource/sj2-2551x-smt.pdf, MF=CUI, MP=SJ2-25515B-SMT-TR, Price=None, Specification="5-Contact 2.5mm", Supplier 1=Digi-Key
J3: "Micro B, USB 2.0, 1.8 A, Right Angle, Surface Mount (SMT), USB Receptacle", Package=None, Availability=Warning, Check_prices=https://www.snapeda.com/parts/UJ2-MIBH-G-SMT-TR/CUI%20Devices/view-part/5487872/?ref=eda, CUI_purchase_URL=https://www.cuidevices.com/product/interconnect/connectors/usb-connectors/uj2-mibh-g-smt-tr?utm_source=snapeda.com&utm_medium=referral&utm_campaign=snapedaBOM, MF="CUI Devices", MP=UJ2-MIBH-G-SMT-TR, Price=None, Purchase-URL=https://pricing.snapeda.com/search/part/UJ2-MIBH-G-SMT-TR/?ref=eda, SnapEDA_Link=https://www.snapeda.com/parts/UJ2-MIBH-G-SMT-TR/CUI%20Devices/view-part/5487872/?ref=snap
J4: "Coaxial Connector with Switch", Manufacturer=Murata, Part number IPS=00000009955, Supplier Part Number 1=490-4981-1-ND, Artikkelnr Noca=55029011, ComponentLink1Description=Datasheet, ComponentLink2Description="Supplier link", Footprint Doc=COAXIAL-SWF, HelpURL=http://www.murata.com/products/catalog/pdf/o33e.pdf, LatestRevisionDate=2014-04-24, Manufacturer Part Number=MM8130-2600, Part Number=MM8130-2600, Pin Count=3, Published=2014-04-24, Publisher="Nordic Semiconductor", Supplier 1=Digi-Key, Supplier 2=Mouser, Supplier Part Number 2=81-MM8130-2600RA2
L1: "6.8µH Shielded Coupled Inductors 1.2A 160mOhm Max 1919 (4.8x4.8 Metric)", Inductance="6.8 uH", Manufacturer=Coilcraft, Manufacturer Part Number=LPD5030-682MR, Maximum DC Current="1.2 A", Maximum DC Resistance="160 mOhms", Maximum Operating Temperature="+ 125 C", Minimum Operating Temperature="- 40 C", Self Resonant Frequency="40 MHz", Test Frequency="100 kHz", Tolerance="30 %", Application=Power, Brand=Coilcraft, Category="Fixed Coupled Inductors", ComponentLink1Description=https://www.coilcraft.com/en-us/products/power/coupled-inductors/1-1-shielded-coupled/msd_h/msd1048h/#, ComponentLink1URL=https://www.coilcraft.com/getmedia/492eebb2-11bb-49ba-b07b-44c830c73f93/msd1048h.pdf, Height="2.9 mm", Length="4.8 mm", Minimum Order Quantity=1, Mount="Surface Mount", Mounting Style="PCB Mount", Packaging="Cut Tape", Product="Power Inductors", Product Type="Fixed Coupled Inductors", Reeling=True, Series=LPD5030, Shielding=Shielded, Subcategory="Inductors, Chokes & Coils", Termination=-, Termination Style=SMD/SMT, Type="SMD Inductor", Width="4.8 mm"
L2: library part L0603-10µ, "Inductor, 80mA, ±10%", Manufacturer="Taiyo Yuden", Manufacturer Part Number=LBMF1608T100K, Part number IPS=00000007794, Supplier Part Number 1=587-1714-1-ND, Artikkelnr Noca=33029314, ComponentLink1Description=Datasheet, ComponentLink2Description="Supplier link", Footprint Doc=0603, HelpURL=http://www.yuden.co.jp/ut/product/pdf/elb2_e.pdf, LatestRevisionDate=2012-09-19, Note="LBMF1608T100K 10µH 80mA 0603", Part Number=L0603-10µ, Pin Count=2, Published=2010-02-24, Publisher="Nordic Semiconductor", Supplier 1=Digi-Key, Supplier 2=Farnell, Supplier Part Number 2=178-6105
L3: library part L0402-15n, "Inductor, 320mA, ±5%", Manufacturer="Taiyo Yuden", Manufacturer Part Number=HK100515NJ-T, Part number IPS=00000001262, Supplier Part Number 1=587-1521-1-ND, Artikkelnr Noca=33029323, ComponentLink1Description=Datasheet, ComponentLink2Description="Supplier link", Footprint Doc=0402, HelpURL=http://www.yuden.co.jp/productdata/catalog/en/mlci04_e.pdf, LatestRevisionDate=2012-09-19, Note="High frequency chip inductor ±10%", Part Number=L0402-15n, Pin Count=2, Published=2010-07-12, Publisher="Nordic Semiconductor", Supplier 1=Digi-Key, Supplier 2=Farnell, Supplier Part Number 2=658-1328
L4: library part L0603-10µ-TDK, "Inductor, 250mA, ±20%, 1.05ohm. -55°C ~ 125°C", Manufacturer=TDK, Manufacturer Part Number=MLZ1608M100WTD25, Supplier Part Number 1=445-175588-1-ND, ComponentLink1Description=Datasheet, ComponentLink2Description="Supplier link", Footprint Doc=0603, HelpURL=https://product.tdk.com/info/en/catalog/datasheets/inductor_automotive_decoupling_mlz1608_en.pdf, LatestRevisionDate=2012-09-19, Part Number=L0603-10µ-TDK, Pin Count=2, Published=2019-05-06, Publisher="Nordic Semiconductor", Supplier 1=Digi-Key, Supplier 2=Mouser, Supplier Part Number 2=810-MLZ1608M100WTD25
L5: library part L0402-4n7, "Inductor, 160mA, ±0.1nH", Manufacturer=Murata, Manufacturer Part Number=LQP15MN4N7B02D, Part number IPS=N.A., Supplier Part Number 1=490-1132-1-ND, Artikkelnr Noca=33029164, ComponentLink1Description=Datasheet, ComponentLink2Description="Supplier link", Footprint Doc=0402, HelpURL=http://search.murata.co.jp/Ceramy/image/img/PDF/ENG/L0075S0084LQP15M.pdf, LatestRevisionDate=2012-09-19, Note="High frequency chip inductor ±5%", Part Number=L0402-4n7, Pin Count=2, Published=2009-05-08, Publisher="Nordic Semiconductor", Supplier 1=Digi-Key
NT1 NT2 NT3 NT4 NT5 NT6 NT7 NT8 NT9: library part "Net Tie Line", ClassName="Net Tie"
R1 R2 R3: "100 Ohms ±1% 0.063W, 1/16W Chip Resistor 0402 (1005 Metric) Moisture Resistant Thick Film", Case Code (Imperial)=0402, Case Code (Metric)=1005, Manufacturer=Yageo, Manufacturer Part Number=RC0402FR-07100RL, Max Operating Temperature=155°C, Min Operating Temperature=-55°C, Power Rating=62.5mW, Resistance=100R, Supplier Part Number 1=311-100LRDKR-ND, Temperature Coefficient=100ppm/°C, Tolerance=1%, Voltage Rating=50V, Case/Package=0402, ComponentLink1Description=http://www.farnell.com/datasheets/2167052.pdf?src-supplier=Element14, ComponentLink1URL=http://www.farnell.com/datasheets/2167052.pdf?src-supplier=Element14, ComponentLink2Description=http://www.yageo.com/documents/recent/PYu-RC_Group_51_RoHS_L_9.pdf?src-supplier=Mouser, ComponentLink2URL=http://www.yageo.com/documents/recent/PYu-RC_Group_51_RoHS_L_9.pdf?src-supplier=Mouser, ComponentLink3Description=http://www.yageo.com/documents/recent/PYu-RC0402_51_RoHS_L_6_r.pdf?src-supplier=Future+Electronics, ComponentLink3URL=http://www.yageo.com/documents/recent/PYu-RC0402_51_RoHS_L_6_r.pdf?src-supplier=Future+Electronics, ComponentLink4Description=https://www.verical.com/server-webapp/html/getDatasheet?partID=329466&src-supplier=Verical, ComponentLink4URL=https://www.verical.com/server-webapp/html/getDatasheet?partID=329466&src-supplier=Verical, ComponentLink5Description=http://www.farnell.com/datasheets/1018594.pdf?src-supplier=Element14, ComponentLink5URL=http://www.farnell.com/datasheets/1018594.pdf?src-supplier=Element14, ComponentLink6Description=http://documents.rs-components.com/techlib://itc_doclist_GB.htm?stockno=6185810&src-supplier=RSComponents, ComponentLink6URL=http://documents.rs-components.com/techlib://itc_doclist_GB.htm?stockno=6185810&src-supplier=RSComponents, Composition="Thick Film", Depth=0.5mm, Height=0.32mm, Lead Free="Lead Free", Length=1mm, Military Standard=Not, Number of Pins=2, Packaging="Tape and Reel", Pricing 1="1=0.1, 10=0.016, 100=0.0064, 1000=0.0029, 2500=0.0025, 5000=0.0021 (USD)", REACH SVHC="No SVHC", Stock 1=16989760, Supplier 1=Digi-Key, Termination=SMD/SMT, Voltage Rating (DC)=50V, Width=0.5mm
R4 R27: "63.4 kOhms ±1% 0.063W, 1/16W Chip Resistor 0402 (1005 Metric) Moisture Resistant Thick Film", Case Code (Imperial)=0402, Case Code (Metric)=1005, Manufacturer=Yageo, Manufacturer Part Number=RC0402FR-0763K4L, Max Operating Temperature=155°C, Max Power Dissipation=63mW, Min Operating Temperature=-55°C, Power Rating=62.5mW, Resistance=63.4kR, Supplier Part Number 1=YAG3204CT-ND, Temperature Coefficient=100ppm/°C, Tolerance=1%, Voltage Rating=50V, Case/Package=0402, ComponentLink1Description=http://www.yageo.com/documents/recent/PYu-RC0402_51_RoHS_L_6.pdf?src-supplier=Avnet+Europe, ComponentLink1URL=http://www.yageo.com/documents/recent/PYu-RC0402_51_RoHS_L_6.pdf?src-supplier=Avnet+Europe, ComponentLink2Description=http://www.yageo.com/documents/recent/PYu-RC0402_51_RoHS_L_6_r.pdf?src-supplier=Future+Electronics, ComponentLink2URL=http://www.yageo.com/documents/recent/PYu-RC0402_51_RoHS_L_6_r.pdf?src-supplier=Future+Electronics, ComponentLink3Description=http://www.yageo.com/documents/recent/PYu-RC0402_51_RoHS_L_6.pdf?src-supplier=Avnet, ComponentLink3URL=http://www.yageo.com/documents/recent/PYu-RC0402_51_RoHS_L_6.pdf?src-supplier=Avnet, Composition="Thick Film", Contact Plating=Tin,Matte, Depth=0.5mm, Features="Moisture Resistant", Height=0.016inch, Lead Free="Lead Free", Length=1mm, Military Standard=Not, Number of Terminations=2, Packaging="Tape and Reel", Pricing 1="1=0.1, 10=0.015, 100=0.0062, 1000=0.0028, 2500=0.0024, 5000=0.002 (USD)", Stock 1=453897, Supplier 1=Digi-Key, Termination=SMD/SMT, Width=0.02inch
  R27: Mount="Surface Mount"